# EAGLE board twip-mb1 (EAGLE 9.2.2)
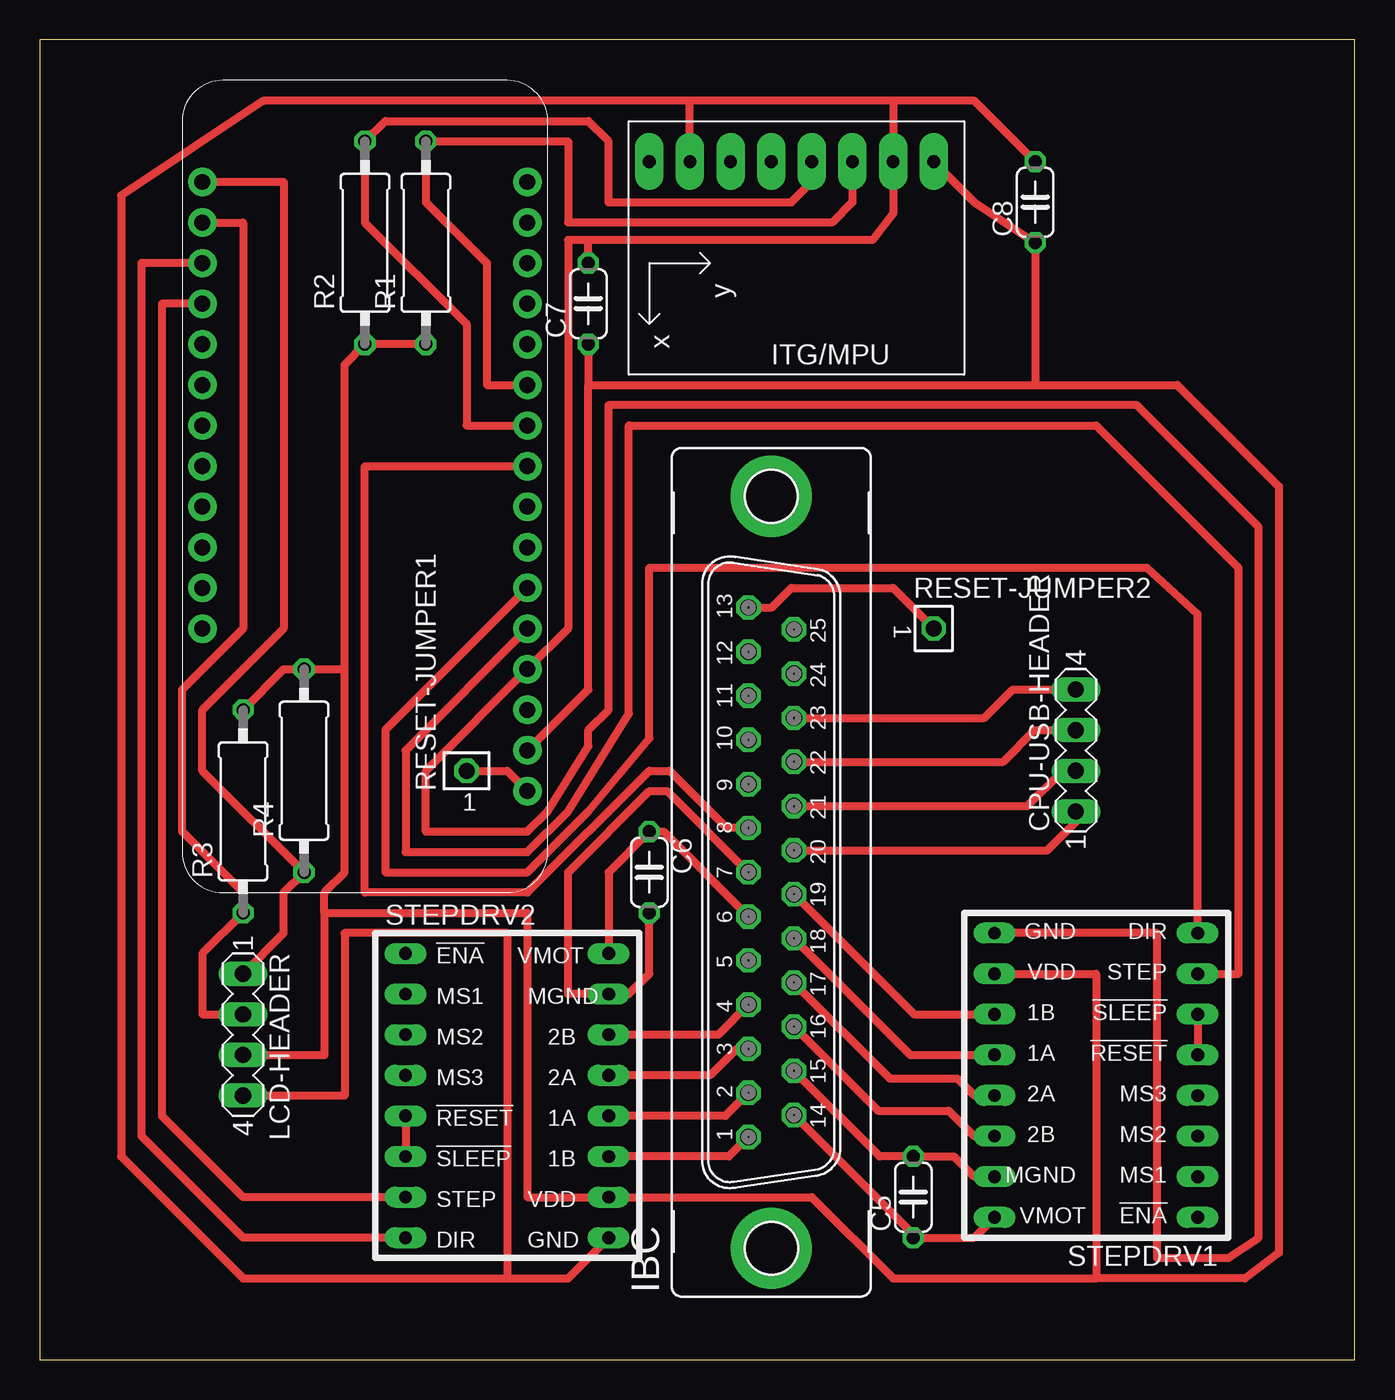
[diagram p0: board, top side]

Size 82.22 x 82.54 mm. Coordinates in mm from the lower left corner, seen from the top.
Outline: 0,0 82.22,0 82.22,82.54 0,82.54 0,0
Copper layers (1*16): Top 0.035mm / dielectric 1.5mm / Bottom 0.035mm
Design rules "default": minimum track width 6mil, minimum drill 0.35mm, track to track 6mil, track to pad 6mil, pad to pad 6mil, via to via 6mil, smd to smd 6mil, copper to edge 40mil, drill to drill 6mil, minimum pad ring 10mil, minimum via ring 8mil, stop-mask expansion 4mil, vias tented up to drill 0mil, thermal gap 10mil

## Footprints (pad centres in the part's own frame; a part is rotated, then mirrored left to right if it is on the bottom)
C050-024X044 = drill 0.813 octagon: 1 -2.54,0; 2 2.54,0
MA04-1 = drill 1.016 long: 1 -3.81,0; 2 -1.27,0; 3 1.27,0; 4 3.81,0
M25VP = drill 1.016 octagon: 1 -16.561,1.422; 2 -13.792,1.422; 3 -11.049,1.422; 4 -8.28,1.422; 5 -5.512,1.422; 6 -2.769,1.422; 7 0,1.422; 8 2.769,1.422; 9 5.512,1.422; 10 8.28,1.422; 11 11.049,1.422; 12 13.792,1.422; 13 16.561,1.422; 14 -15.189,-1.422; 15 -12.421,-1.422; 16 -9.652,-1.422; 17 -6.909,-1.422; 18 -4.14,-1.422; 19 -1.372,-1.422; 20 1.372,-1.422; 21 4.14,-1.422; 22 6.909,-1.422; 23 9.652,-1.422; 24 12.421,-1.422; 25 15.189,-1.422 | drill 3.302 pad 5.08: G1 -23.52,0; G2 23.52,0
FEATHERWING_NOHOLES = drill 1 pad 1.778: 1 6.35,1.27; 2 8.89,1.27; 3 11.43,1.27; 4 13.97,1.27; 5 16.51,1.27; 6 19.05,1.27; 7 21.59,1.27; 8 24.13,1.27; 9 26.67,1.27; 10 29.21,1.27; 11 31.75,1.27; 12 34.29,1.27; 13 36.83,1.27; 14 39.37,1.27; 15 41.91,1.27; 16 44.45,1.27; 17 44.45,21.59; 18 41.91,21.59; 19 39.37,21.59; 20 36.83,21.59; 21 34.29,21.59; 22 31.75,21.59; 23 29.21,21.59; 24 26.67,21.59; 25 24.13,21.59; 26 21.59,21.59; 27 19.05,21.59; 28 16.51,21.59
0309/12 = drill 0.813 octagon: 1 -6.35,0; 2 6.35,0
TSW-101-XX-G-S = drill 1 pad 1.5 octagon: 1 0,0
POLOLULU2128 = drill 0.8 long: 1 -7.62,7.62; 2 -7.62,5.08; 3 -7.62,2.54; 4 -7.62,0; 5 -7.62,-2.54; 6 -7.62,-5.08; 7 -7.62,-7.62; 8 -7.62,-10.16; 9 5.08,-10.16; 10 5.08,-7.62; 11 5.08,-5.08; 12 5.08,-2.54; 13 5.08,0; 14 5.08,2.54; 15 5.08,5.08; 16 5.08,7.62
GY-521 = drill 0.8 pad 1.778 long: ADO -8.89,-6.35; GND -8.89,6.35; INT -8.89,-8.89; SCL -8.89,3.81; SDA -8.89,1.27; VCC -8.89,8.89; XCL -8.89,-3.81; XDA -8.89,-1.27

## Placement (x,y rotation side)
C5  [C050-024X044]  54.61,10.16 90 top
C6  [C050-024X044]  38.1,30.48 270 top
C7  [C050-024X044]  34.29,66.04 90 top
C8  [C050-024X044]  62.23,72.39 90 top
CPU-USB-HEADER  [MA04-1]  64.77,38.1 90 top
IBC  [M25VP]  45.72,30.48 90 top
LCD-HEADER  [MA04-1]  12.7,20.32 270 top
MS2  FEATHERWING_NOHOLES  [FEATHERWING_NOHOLES]  31.75,29.21 90 top
R1  2K2  [0309/12]  24.13,69.85 90 top
R2  2K2  [0309/12]  20.32,69.85 90 top
R3  2K2  [0309/12]  12.7,34.29 90 top
R4  2K2  [0309/12]  16.51,36.83 90 top
RESET-JUMPER1  TSW-101-07-G-S  [TSW-101-XX-G-S]  26.67,36.83 0 top
RESET-JUMPER2  TSW-101-07-G-S  [TSW-101-XX-G-S]  55.88,45.72 270 top
STEPDRV1  POLOLULU2128  [POLOLULU2128]  64.77,16.51 180 top
STEPDRV2  POLOLULU2128  [POLOLULU2128]  30.48,17.78 0 top
U1  GY-521MPU6050  [GY-521]  46.99,66.04 270 top

## Library data of the parts
C5-C8 = rcl; SPICEPREFIX: C
CPU-USB-HEADER LCD-HEADER = con-lstb; OC_FARNELL: unknown; OC_NEWARK: unknown
IBC = con-subd; OC_FARNELL: unknown; OC_NEWARK: unknown
MS2 = microbuilder
R1-R4 = resistor
RESET-JUMPER1 RESET-JUMPER2 = con-samtec; MF: Samtec Inc.; MPN: TSW-101-07-G-S
STEPDRV1 STEPDRV2 = stepper_drivers_etc
U1 = gy-521

## Nets
3V: C7.1 C8.1 LCD-HEADER.3 MS2.2 R1.1 R2.1 R3.2 R4.2 STEPDRV1.10 STEPDRV2.10 U1.VCC
N$1: IBC.13 RESET-JUMPER2.1
N$2: C6.2 IBC.7 STEPDRV2.15
N$3: IBC.16 STEPDRV1.14
N$4: IBC.17 STEPDRV1.13
N$5: MS2.5 STEPDRV1.7
N$6: IBC.18 STEPDRV1.12
N$7: IBC.19 STEPDRV1.11
N$8: IBC.1 STEPDRV2.11
N$9: IBC.2 STEPDRV2.12
N$10: IBC.3 STEPDRV2.13
N$11: LCD-HEADER.2 MS2.18 R3.1
N$12: IBC.4 STEPDRV2.14
N$13: CPU-USB-HEADER.4 IBC.23
N$14: CPU-USB-HEADER.3 IBC.22
N$15: MS2.6 STEPDRV1.8
N$16: MS2.1 RESET-JUMPER1.1
N$17: MS2.11 R1.2 U1.SCL
N$18: CPU-USB-HEADER.2 IBC.21
N$19: LCD-HEADER.1 MS2.17 R4.1
N$20: C5.2 IBC.15 STEPDRV1.15
N$21: C6.1 IBC.6 STEPDRV2.16
N$22: C5.1 IBC.14 STEPDRV1.16
N$23: STEPDRV1.5 STEPDRV1.6
N$24: STEPDRV2.5 STEPDRV2.6
N$25: MS2.10 R2.2 U1.SDA
N$27: MS2.19 STEPDRV2.8
N$28: IBC.8 MS2.9
N$29: MS2.20 STEPDRV2.7
N$30: CPU-USB-HEADER.1 IBC.20
N$35: C7.2 C8.2 LCD-HEADER.4 MS2.4 STEPDRV1.9 STEPDRV2.9 U1.ADO U1.GND

## Tracks (layer width: path | path; a pad name or v marks a point on that pad's centre or on a via)
3V
  Top 0.508: MS2.2 34.29,41.91 34.29,60.96 | STEPDRV1.10 66.04,24.13 66.04,5.08 | 66.04,5.08 75.35,5.08 77.47,6.67 77.47,54.61 71.12,60.96 62.23,60.96 | 34.29,60.96 62.23,60.96 | 66.04,5.08 53.34,5.08 48.26,10.16 STEPDRV2.10 30.48,10.16 30.48,27.94 17.78,27.94 | LCD-HEADER.3 17.78,19.05 17.78,27.94 | U1.VCC 58.42,72.39 C8.1 62.23,60.96 | C7.1 34.29,60.96 | 19.05,43.18 19.05,30.48 17.78,29.21 17.78,27.94 | 19.05,43.18 19.05,62.23 R2.1 R1.1 | R3.2 15.24,43.18 R4.2 19.05,43.18
N$1
  Top 0.508: IBC.13 45.77,47.04 46.99,48.26 53.34,48.26 RESET-JUMPER2.1
N$2
  Top 0.508: IBC.7 39.22,35.56 38.1,35.56 33.02,30.48 33.02,22.86 STEPDRV2.15 36.83,22.86 38.1,24.13 C6.2
N$3
  Top 0.508: IBC.16 52.4,15.57 56.82,15.57 58.42,13.97 STEPDRV1.14
N$4
  Top 0.508: IBC.17 53.14,17.58 57.35,17.58 58.42,16.51 STEPDRV1.13
N$5
  Top 0.508: STEPDRV1.7 74.93,24.13 74.93,49.53 66.04,58.42 36.83,58.42 36.83,40.39 33.02,34.29 30.48,31.75 22.86,31.75 22.86,38.1 MS2.5
N$6
  Top 0.508: IBC.18 54.43,19.05 STEPDRV1.12
N$7
  Top 0.508: IBC.19 54.66,21.59 STEPDRV1.11
N$8
  Top 0.508: 44.25,13.97 IBC.1 43.08,12.7 STEPDRV2.11
N$9
  Top 0.508: 44.12,16.51 IBC.2 42.85,15.24 STEPDRV2.12
N$10
  Top 0.508: 43.92,19.05 IBC.3 43.56,19.43 41.91,17.78 STEPDRV2.13
N$11
  Top 0.508: 13.97,21.59 LCD-HEADER.2 10.16,21.59 10.16,25.4 R3.1 12.7,29.21 8.89,33.02 8.89,41.91 12.7,45.72 12.7,71.12 MS2.18
N$12
  Top 0.508: IBC.4 42.42,20.32 STEPDRV2.14
N$13
  Top 0.508: IBC.23 59.05,40.13 60.82,41.91 CPU-USB-HEADER.4
N$14
  Top 0.508: IBC.22 60.22,37.39 62.2,39.37 CPU-USB-HEADER.3
N$15
  Top 0.508: STEPDRV1.8 72.39,46.64 70.19,48.64 69.22,49.53 38.1,49.53 38.1,38.86 34.29,34.29 30.48,30.48 21.59,30.48 21.59,39.37 MS2.6
N$16
  Top 0.508: RESET-JUMPER1.1 29.21,36.83 MS2.1
N$17
  Top 0.508: U1.SCL 50.8,72.39 49.53,71.12 33.02,71.12 33.02,76.2 R1.2 24.13,72.39 27.94,68.58 27.94,60.96 MS2.11
N$18
  Top 0.508: IBC.21 61.74,34.62 63.95,36.83 CPU-USB-HEADER.2
N$19
  Top 0.508: MS2.17 15.24,73.66 15.24,45.72 10.16,40.64 10.16,36.83 R4.1 15.24,29.21 15.24,26.67 LCD-HEADER.1
N$20
  Top 0.508: IBC.15 52.5,12.7 C5.2 57.15,12.7 58.42,11.43 STEPDRV1.15
N$21
  Top 0.508: STEPDRV2.16 35.56,30.48 C6.1 38.99,33.02 IBC.6
N$22
  Top 0.508: IBC.14 54.61,7.82 C5.1 58.42,7.62 STEPDRV1.16
N$23
  Top 0.508: STEPDRV1.6 STEPDRV1.5
N$24
  Top 0.508: STEPDRV2.5 STEPDRV2.6
N$25
  Top 0.508: U1.SDA 48.26,73.66 46.99,72.39 35.56,72.39 35.56,76.2 34.29,77.47 21.59,77.47 R2.2 20.32,71.12 26.67,64.77 26.67,58.42 MS2.10
N$27
  Top 0.508: MS2.19 6.35,68.58 6.35,13.97 12.7,7.62 STEPDRV2.8
N$28
  Top 0.508: IBC.8 42.95,33.25 39.37,36.83 38.1,36.83 30.48,29.21 20.32,29.21 20.32,55.88 MS2.9
N$29
  Top 0.508: MS2.20 7.62,66.04 7.62,15.24 12.7,10.16 STEPDRV2.7
N$30
  Top 0.508: IBC.20 62.98,31.85 64.77,33.64 CPU-USB-HEADER.1
N$35
  Top 0.508: 53.34,78.74 U1.GND 53.34,71.66 52.07,70.03 34.29,70.03 | 34.29,70.03 33.02,70.03 33.02,45.72 MS2.4 24.13,36.83 24.13,33.02 30.48,33.02 31.75,34.29 34.29,38.35 34.29,39.37 35.56,40.64 35.56,59.69 68.58,59.69 76.2,52.07 76.2,7.62 74.3,6.35 69.85,6.35 69.85,26.67 STEPDRV1.9 | 53.34,78.74 40.64,78.74 | 40.64,78.74 13.97,78.74 5.08,72.81 5.08,12.7 12.7,5.08 29.21,5.08 | 29.21,5.08 33.02,5.08 STEPDRV2.9 | LCD-HEADER.4 19.05,16.51 19.05,26.67 29.21,26.67 29.21,5.08 | U1.ADO 40.64,78.74 | C8.2 58.42,78.74 53.34,78.74 | C7.2 34.29,70.03